# Altium PCB Project_traffic.PcbDoc
Units mil, origin at the board's own origin, x right, y up, seen from the top; angles counter-clockwise.
Board outline 3220 x 3730 mil, 2 copper layers (Top Layer, Bottom Layer); 48 components, 14 nets, 216 pads, 0 vias.
Unrouted connection lines stored in the file: 1.
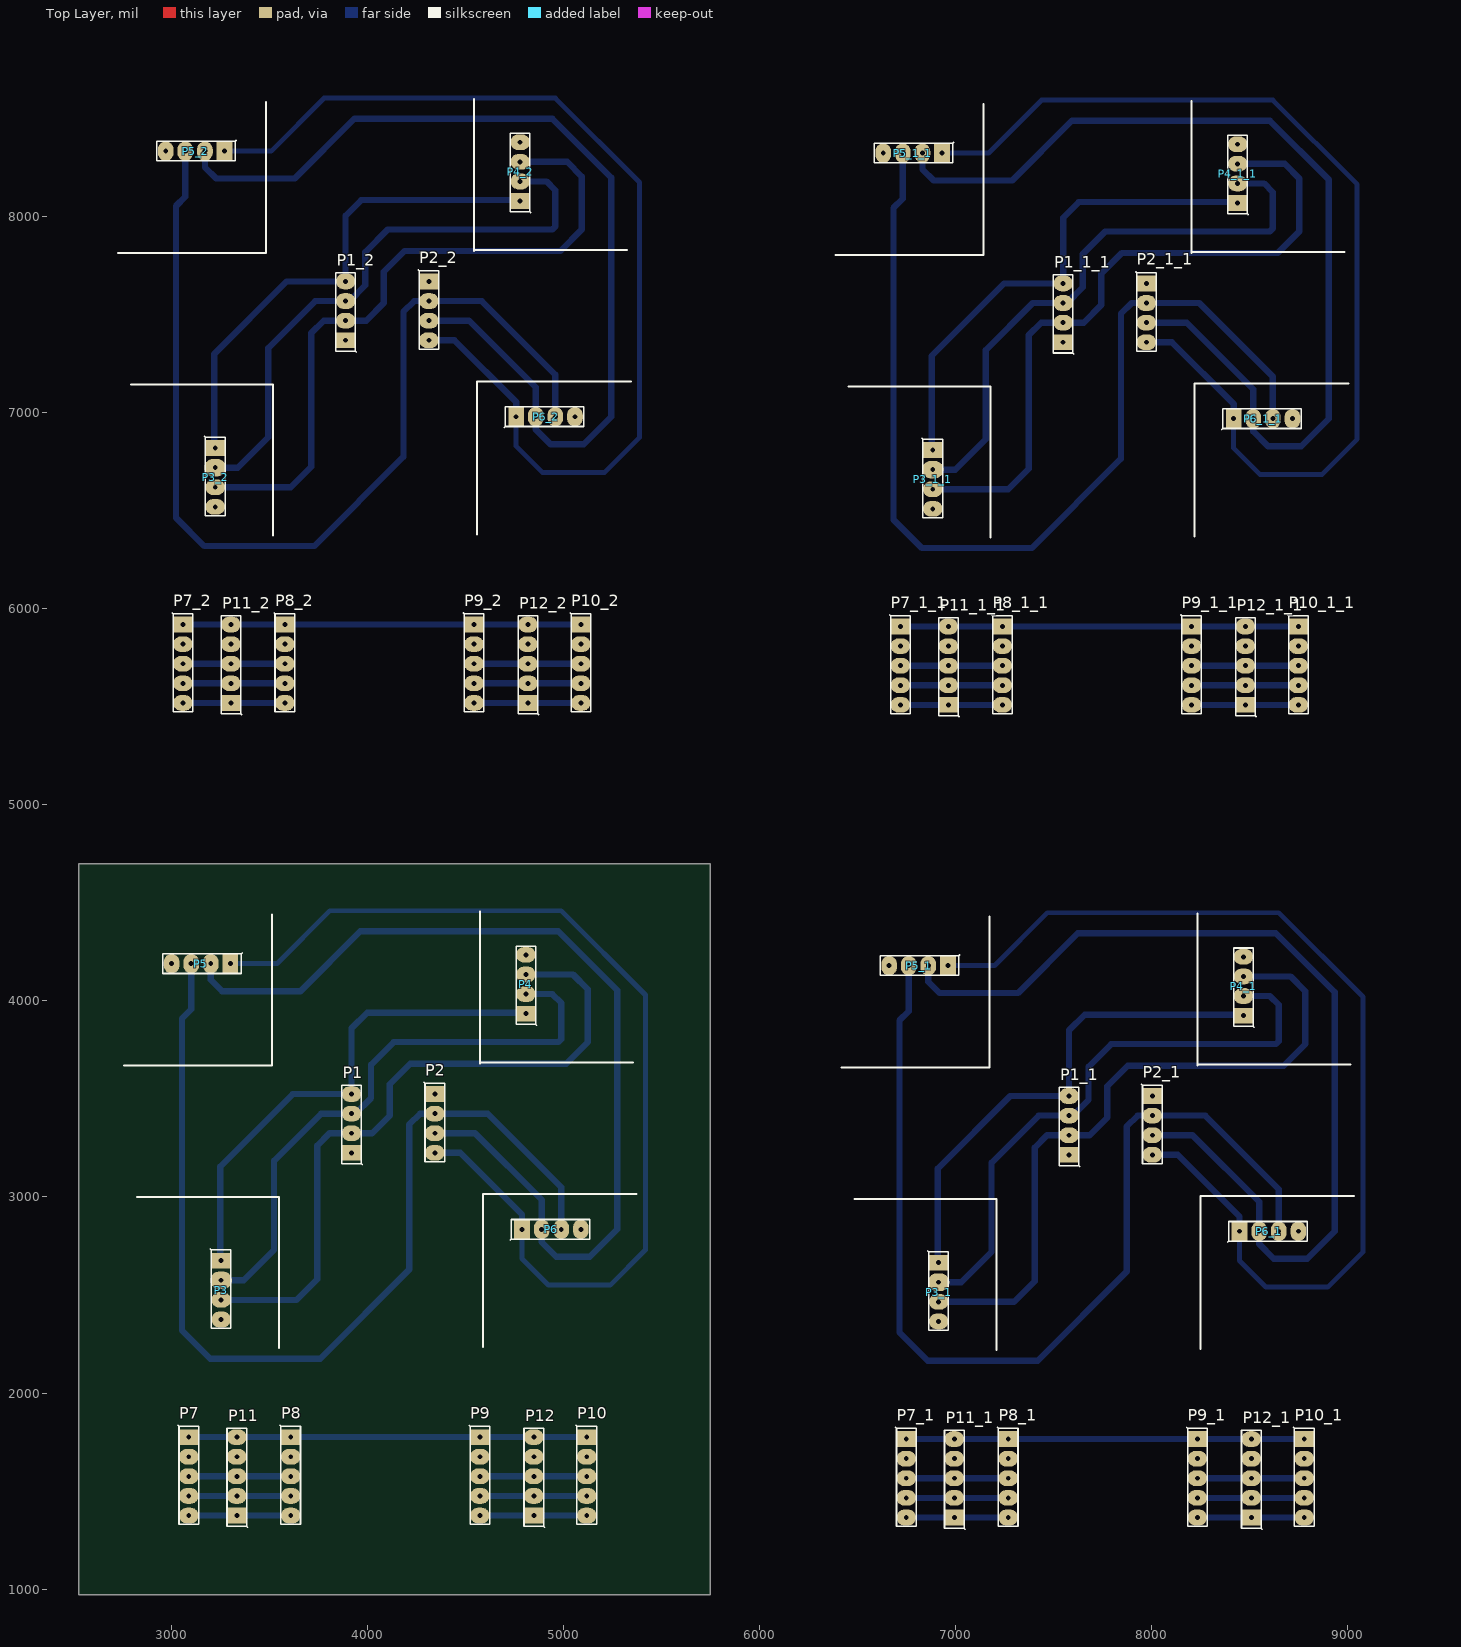
[diagram p0: Top Layer view]
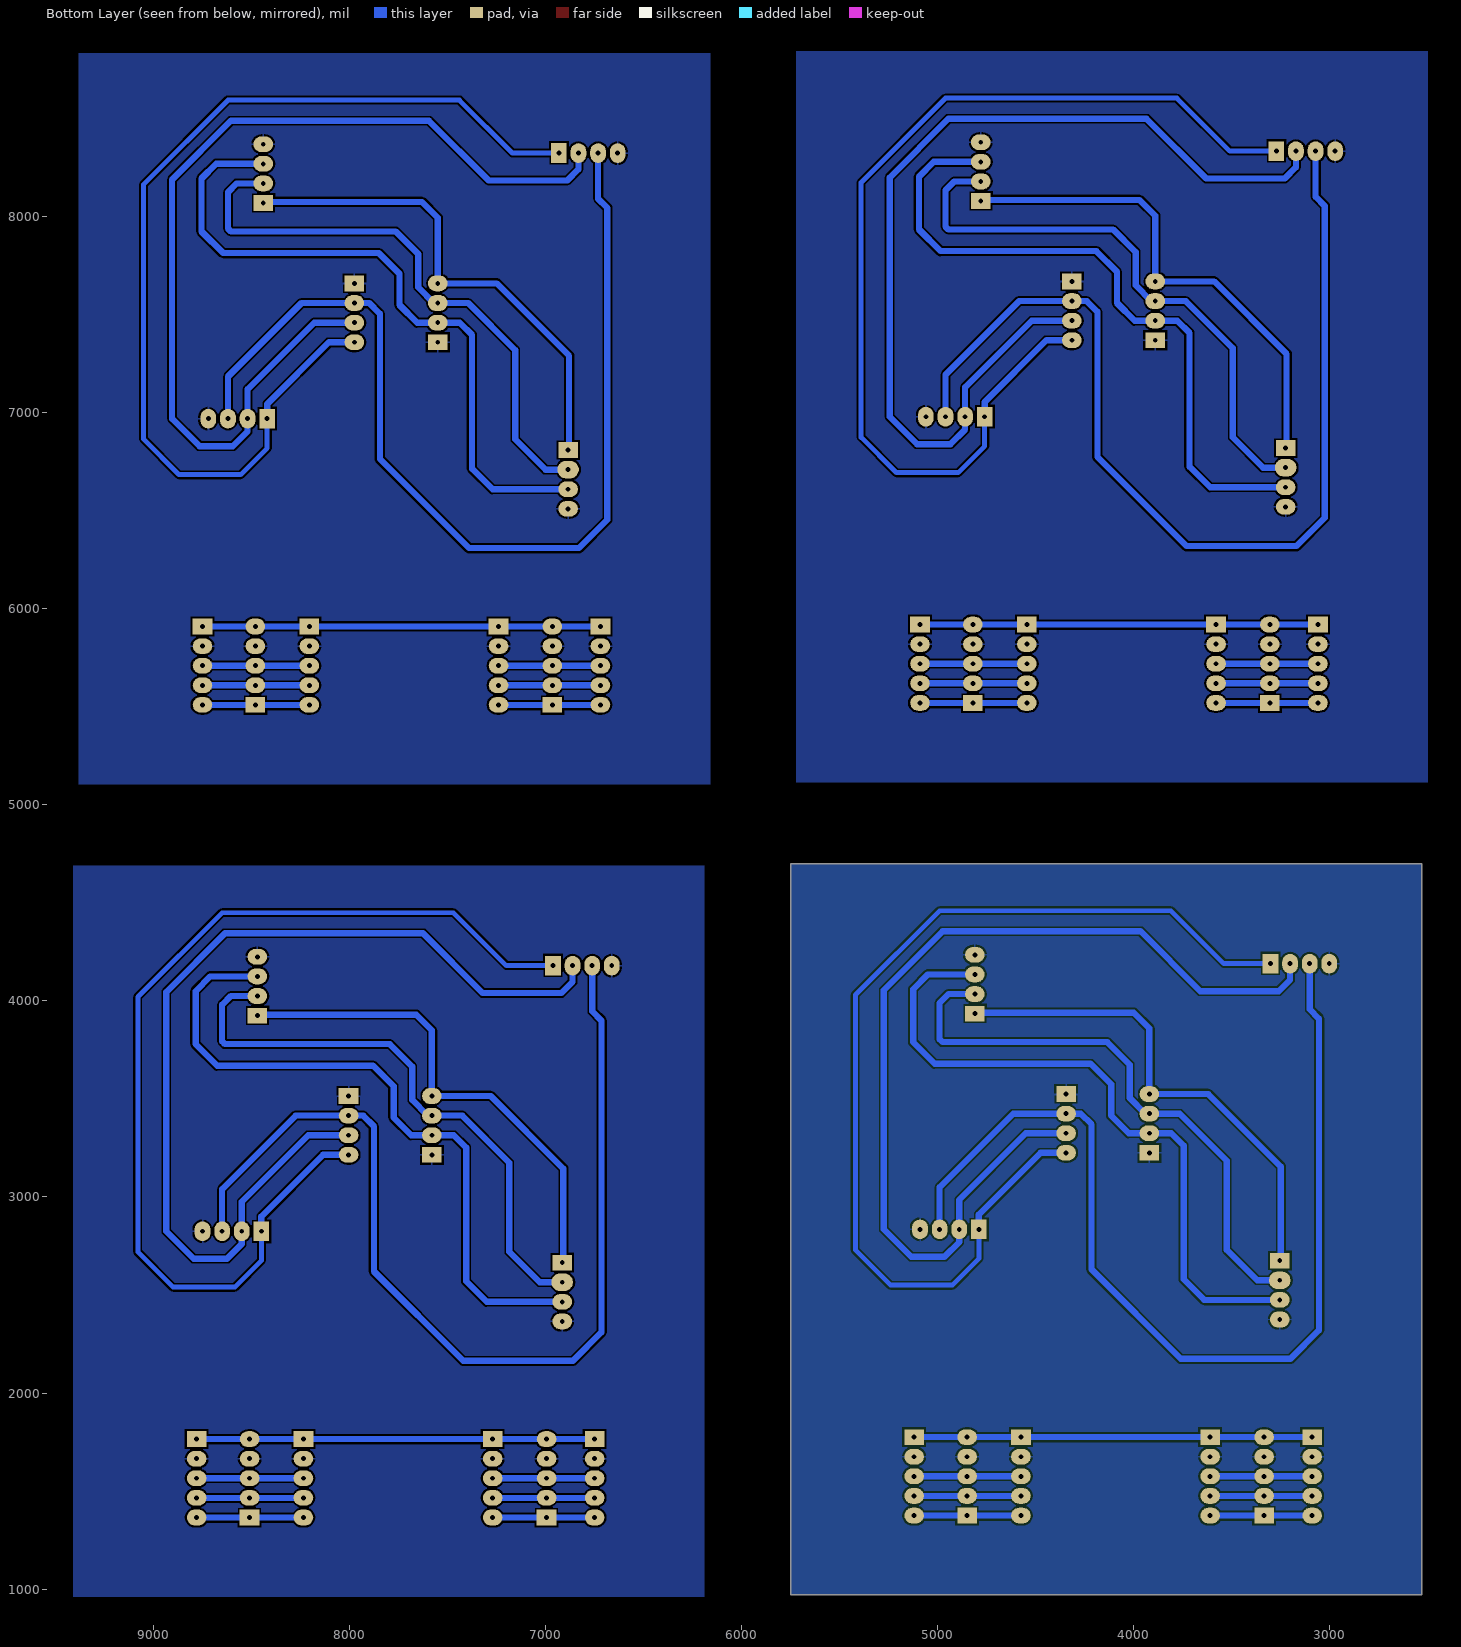
[diagram p1: Bottom Layer view, seen from below]

## Layer stack, top to bottom
Top Solder: solder mask 0.4, Solder Resist, Dk 3.5
Top Layer: signal copper 1.4
Dielectric 1: dielectric 12.6, FR-4, Dk 4.8
Bottom Layer: signal copper 1.4
Bottom Solder: solder mask 0.4, Solder Resist, Dk 3.5

## Board outline
2530,970 5750,970 5750,4700 2530,4700

## Design rules (kind name [scope] priority, off if disabled: settings)
Clearance [All] p1: gap=10 ignorepadtopadclearanceinfootprint=FALSE except(0: Arc-Hole Track-Hole SMDPad-Hole THPad-Hole Via-Hole Fill-Hole Poly-Hole Region-Hole Text-Hole)
PolygonConnect [All] p1: connectstyle=Relief reliefconductorwidth=10 reliefentries=4 polygonreliefangle="90 Angle" airgapwidth=10
RoutingVias [All] p1: holewidth=28 width=50 viastyle="Through Hole" minholewidth=28 minwidth=50 maxholewidth=28 maxwidth=50
SolderMaskExpansion [All] p1: expansion=4
Width [All] p1: maxlimit=50 minlimit=10 preferedwidth=25 toplayer_maxwidth=10 toplayer_prefwidth=10 minimp=50.000000 maximp=50.000000 favimp=50.000000
30 further rules are at their usual default settings.

## Classes and differential pairs
component class Project_traffic: P3 P4 P5 P6 P7 P8 P9 P10 P12

## Components (designator, comment, footprint, x,y, rotation, side; value= is the part's Value field where it differs from the comment)
P1 "Header 4" "Header 4"#1 3920,3225 r90 top
P1_1 "Header 4" "Header 4"#1 7580,3215 r90 top (schematic designator P1)
P1_1_1 "Header 4" "Header 4"#1 7550,7360 r90 top (schematic designator P1)
P1_2 "Header 4" "Header 4"#1 3890,7370 r90 top (schematic designator P1)
P2 "Header 4" "Header 4"#1 4345,3525 r270 top
P2_1 "Header 4" "Header 4"#1 8005,3515 r270 top (schematic designator P2)
P2_1_1 "Header 4" "Header 4"#1 7975,7660 r270 top (schematic designator P2)
P2_2 "Header 4" "Header 4"#1 4315,7670 r270 top (schematic designator P2)
P3 "Header 4" "Header 4"#2 3255,2675 r270 top
P3_1 "Header 4" "Header 4"#2 6915,2665 r270 top (schematic designator P3)
P3_1_1 "Header 4" "Header 4"#2 6885,6810 r270 top (schematic designator P3)
P3_2 "Header 4" "Header 4"#2 3225,6820 r270 top (schematic designator P3)
P4 "Header 4" "Header 4"#1 4810,3935 r90 top
P4_1 "Header 4" "Header 4"#1 8470,3925 r90 top (schematic designator P4)
P4_1_1 "Header 4" "Header 4"#1 8440,8070 r90 top (schematic designator P4)
P4_2 "Header 4" "Header 4"#1 4780,8080 r90 top (schematic designator P4)
P5 "Header 4" "Header 4"#1 3302.34,4190 r180 top
P5_1 "Header 4" "Header 4"#1 6962.34,4180 r180 top (schematic designator P5)
P5_1_1 "Header 4" "Header 4"#1 6932.34,8325 r180 top (schematic designator P5)
P5_2 "Header 4" "Header 4"#1 3272.34,8335 r180 top (schematic designator P5)
P6 "Header 4" "Header 4"#1 4790,2835 r0 top
P6_1 "Header 4" "Header 4"#1 8450,2825 r0 top (schematic designator P6)
P6_1_1 "Header 4" "Header 4"#1 8420,6970 r0 top (schematic designator P6)
P6_2 "Header 4" "Header 4"#1 4760,6980 r0 top (schematic designator P6)
P7 "Header 5" "Header 5" 3090,1775 r270 top
P7_1 "Header 5" "Header 5" 6750,1765 r270 top (schematic designator P7)
P7_1_1 "Header 5" "Header 5" 6720,5910 r270 top (schematic designator P7)
P7_2 "Header 5" "Header 5" 3060,5920 r270 top (schematic designator P7)
P8 "Header 5" "Header 5" 3610,1775 r270 top
P8_1 "Header 5" "Header 5" 7270,1765 r270 top (schematic designator P8)
P8_1_1 "Header 5" "Header 5" 7240,5910 r270 top (schematic designator P8)
P8_2 "Header 5" "Header 5" 3580,5920 r270 top (schematic designator P8)
P9 "Header 5" "Header 5" 4575,1775 r270 top
P9_1 "Header 5" "Header 5" 8235,1765 r270 top (schematic designator P9)
P9_1_1 "Header 5" "Header 5" 8205,5910 r270 top (schematic designator P9)
P9_2 "Header 5" "Header 5" 4545,5920 r270 top (schematic designator P9)
P10 "Header 5" "Header 5" 5120,1775 r270 top
P10_1 "Header 5" "Header 5" 8780,1765 r270 top (schematic designator P10)
P10_1_1 "Header 5" "Header 5" 8750,5910 r270 top (schematic designator P10)
P10_2 "Header 5" "Header 5" 5090,5920 r270 top (schematic designator P10)
P11 "Header 5" "Header 5" 3335,1375 r90 top
P11_1 "Header 5" "Header 5" 6995,1365 r90 top (schematic designator P11)
P11_1_1 "Header 5" "Header 5" 6965,5510 r90 top (schematic designator P11)
P11_2 "Header 5" "Header 5" 3305,5520 r90 top (schematic designator P11)
P12 "Header 5" "Header 5" 4850,1375 r90 top
P12_1 "Header 5" "Header 5" 8510,1365 r90 top (schematic designator P12)
P12_1_1 "Header 5" "Header 5" 8480,5510 r90 top (schematic designator P12)
P12_2 "Header 5" "Header 5" 4820,5520 r90 top (schematic designator P12)

## Footprints (in the part's own frame and the unit in brackets; to place one, negate y for a bottom-side part, rotate by r counter-clockwise, add the part's x,y. Pads: shape width x height; smd on the part's side, far side on the other; paste and mask are expansions set on the pad)
"Header 4"#1 [mil]
  rect 80x100 hole 25: 1(0,0)
  oval 80x100 hole 25: 2(100,0) 3(200,0) 4(300,0)
  silkscreen extent -60,-55 345,50, body extent -50,-50 350,50, height 350
"Header 4"#2 [mil]
  rect 80x100 hole 25: 1(0,0)
  oval 90x110 hole 25: 2(100,0)
  oval 80x100 hole 25: 3(200,0) 4(300,0)
  silkscreen extent -60,-55 345,50, body extent -50,-50 350,50, height 350
"Header 5" [mil]
  rect 80x100 hole 25: 1(0,0)
  oval 80x100 hole 25: 2(100,0) 3(200,0) 4(300,0) 5(400,0)
  silkscreen extent -60,-55 445,50, body extent -50,-50 450,50, height 350

## Part data
P1 P1_1 P1_1_1 P1_2 P2 P2_1 P2_1_1 P2_2 P3 P3_1 P3_1_1 P3_2 P4 P4_1 P4_1_1 P4_2 P5 P5_1 P5_1_1 P5_2 P6 P6_1 P6_1_1 P6_2: "Header, 4-Pin"
P7 P7_1 P7_1_1 P7_2 P8 P8_1 P8_1_1 P8_2 P9 P9_1 P9_1_1 P9_2 P10 P10_1 P10_1_1 P10_2 P11 P11_1 P11_1_1 P11_2 P12 P12_1 P12_1_1 P12_2: "Header, 5-Pin", LatestRevisionDate=17-Jul-2002, LatestRevisionNote="Re-released for DXP Platform.", Publisher="Altium Limited"

## Nets (pads, with @x,y where several pads share a name; then routed paths per layer and width w, separated by ;. In a path a pad name is that pad's centre, name@x,y a point inside that pad or via, vN(x,y) a via of type N, cw(c..) or ccw(c..) an arc to the next point about the centre after c; other vN are vias at no path point)
GND: P1.1 P2.1 P3.4 P4.4 P5.4 P6.4 P7.2 P8.2 P9.2 P10.2 P11.4 P12.4
LOAD1: P7.5 P8.5 P11.1 | length 520
  Bottom Layer w32: P7.5 P11.1 P8.5
LOAD2: P9.5 P10.5 P12.1 | length 545
  Bottom Layer w32: P9.5 P12.1 P10.5
P1_G: P1.4 P3.1 P4.1 | length 2565.5
  Bottom Layer w32: P3.1 3250,2680 3250,3155 3620,3525 P1.4 3920,3860 4000,3940 4805,3940 P4.1
P1_R: P1.2 P3.3 P4.3 | length 3524
  Bottom Layer w32: P3.3 3640,2475 3745,2580 3745,3262 3808,3325 P1.2 4025,3325 4115,3415 4115,3575 4220,3680 5015,3680 5125,3790 5125,4060 5050,4135 P4.3
P1_Y: P1.3 P3.2 P4.2 | length 2994.2
  Bottom Layer w32: P3.2 3370,2575 3525,2730 3525,3185 3765,3425 P1.3 3940,3425 4020,3505 4020,3675 4135,3790 4975,3790 4990,3805 4990,3990 4945,4035 P4.2
P2_G: P2.4 P5.1 P6.1 | length 5268.6
  Bottom Layer w25: P5.1 3540,4190 3810,4460 4990,4460 5420,4030 5420,2730 5240,2550 4925,2550 4790,2685 P6.1
  Bottom Layer w32: P2.4 4475,3225 4790,2910 P6.1
P2_R: P2.2 P5.3 P6.3 | length 5206.2
  Bottom Layer w32: P5.3 3102.34,3957.34 3055,3910 3055,2320 3200,2175 3760,2175 4215,2630 4215,3370 4270,3425 P2.2 4615,3425 4990,3050 P6.3
P2_Y: P2.3 P5.2 P6.2 | length 5024.4
  Bottom Layer w32: P5.2 3202.34,4107.66 3260,4050 3660,4050 3965,4355 4975,4355 5275,4055 5275,2835 5135,2695 4965,2695 4890,2770 P6.2 4890,2985 4550,3325 P2.3
SCLK1: P7.4 P8.4 P11.2 | length 520
  Bottom Layer w32: P7.4 P11.2 P8.4
SCLK2: P9.4 P10.4 P12.2 | length 545
  Bottom Layer w32: P9.4 P12.2 P10.4
SDI1: P7.3 P8.3 P11.3 | length 520
  Bottom Layer w32: P7.3 P11.3 P8.3
SDI2: P9.3 P10.3 P12.3 | length 545
  Bottom Layer w32: P9.3 P12.3 P10.3
VCC: P7.1 P8.1 P9.1 P10.1 P11.5 P12.5 | length 2030
  Bottom Layer w30: P7.1 P11.5 P8.1 P9.1 P12.5 P10.1
pads on no net: P1_1.1 P1_1.2 P1_1.3 P1_1.4 P1_1_1.1 P1_1_1.2 P1_1_1.3 P1_1_1.4 P1_2.1 P1_2.2 P1_2.3 P1_2.4 P2_1.1 P2_1.2 P2_1.3 P2_1.4 P2_1_1.1 P2_1_1.2 P2_1_1.3 P2_1_1.4 P2_2.1 P2_2.2 P2_2.3 P2_2.4 P3_1.1 P3_1.2 P3_1.3 P3_1.4 P3_1_1.1 P3_1_1.2 P3_1_1.3 P3_1_1.4 P3_2.1 P3_2.2 P3_2.3 P3_2.4 P4_1.1 P4_1.2 P4_1.3 P4_1.4 P4_1_1.1 P4_1_1.2 P4_1_1.3 P4_1_1.4 P4_2.1 P4_2.2 P4_2.3 P4_2.4 P5_1.1 P5_1.2 P5_1.3 P5_1.4 P5_1_1.1 P5_1_1.2 P5_1_1.3 P5_1_1.4 P5_2.1 P5_2.2 P5_2.3 P5_2.4 P6_1.1 P6_1.2 P6_1.3 P6_1.4 P6_1_1.1 P6_1_1.2 P6_1_1.3 P6_1_1.4 P6_2.1 P6_2.2 P6_2.3 P6_2.4 P7_1.1 P7_1.2 P7_1.3 P7_1.4 P7_1.5 P7_1_1.1 P7_1_1.2 P7_1_1.3 P7_1_1.4 P7_1_1.5 P7_2.1 P7_2.2 P7_2.3 P7_2.4 P7_2.5 P8_1.1 P8_1.2 P8_1.3 P8_1.4 P8_1.5 P8_1_1.1 P8_1_1.2 P8_1_1.3 P8_1_1.4 P8_1_1.5 P8_2.1 P8_2.2 P8_2.3 P8_2.4 P8_2.5 P9_1.1 P9_1.2 P9_1.3 P9_1.4 P9_1.5 P9_1_1.1 P9_1_1.2 P9_1_1.3 P9_1_1.4 P9_1_1.5 P9_2.1 P9_2.2 P9_2.3 P9_2.4 P9_2.5 P10_1.1 P10_1.2 P10_1.3 P10_1.4 P10_1.5 P10_1_1.1 P10_1_1.2 P10_1_1.3 P10_1_1.4 P10_1_1.5 P10_2.1 P10_2.2 P10_2.3 P10_2.4 P10_2.5 P11_1.1 P11_1.2 P11_1.3 P11_1.4 P11_1.5 P11_1_1.1 P11_1_1.2 P11_1_1.3 P11_1_1.4 P11_1_1.5 P11_2.1 P11_2.2 P11_2.3 P11_2.4 P11_2.5 P12_1.1 P12_1.2 P12_1.3 P12_1.4 P12_1.5 P12_1_1.1 P12_1_1.2 P12_1_1.3 P12_1_1.4 P12_1_1.5 P12_2.1 P12_2.2 P12_2.3 P12_2.4 P12_2.5
copper on no net: | length 89423.9
  Bottom Layer w25: 3272.34,8335 3510,8335 3780,8605 4960,8605 5390,8175 5390,6875 5210,6695 4895,6695 4760,6830 4760,6980 ; 6932.34,8325 7170,8325 7440,8595 8620,8595 9050,8165 9050,6865 8870,6685 8555,6685 8420,6820 8420,6970 ; 6962.34,4180 7200,4180 7470,4450 8650,4450 9080,4020 9080,2720 8900,2540 8585,2540 8450,2675 8450,2825
  Bottom Layer w30: 3060,5920 3305,5920 3580,5920 4545,5920 4820,5920 5090,5920 ; 6720,5910 6965,5910 7240,5910 8205,5910 8480,5910 8750,5910 ; 6750,1765 6995,1765 7270,1765 8235,1765 8510,1765 8780,1765
  Bottom Layer w32: 3060,5520 3305,5520 3580,5520 ; 3060,5620 3305,5620 3580,5620 ; 3060,5720 3305,5720 3580,5720 ; 3072.34,8335 3072.34,8102.34 3025,8055 3025,6465 3170,6320 3730,6320 4185,6775 4185,7515 4240,7570 4315,7570 4585,7570 4960,7195 4960,6980 ; 3172.34,8335 3172.34,8252.66 3230,8195 3630,8195 3935,8500 4945,8500 5245,8200 5245,6980 5105,6840 4935,6840 4860,6915 4860,6980 4860,7130 4520,7470 4315,7470 ; 3225,6620 3610,6620 3715,6725 3715,7407 3778,7470 3890,7470 3995,7470 4085,7560 4085,7720 4190,7825 4985,7825 5095,7935 5095,8205 5020,8280 4780,8280 ; 3225,6720 3340,6720 3495,6875 3495,7330 3735,7570 3890,7570 3910,7570 3990,7650 3990,7820 4105,7935 4945,7935 4960,7950 4960,8135 4915,8180 4780,8180 ; 3225,6820 3220,6825 3220,7300 3590,7670 3890,7670 3890,8005 3970,8085 4775,8085 4780,8080 ; 4315,7370 4445,7370 4760,7055 4760,6980 ; 4545,5520 4820,5520 5090,5520 ; 4545,5620 4820,5620 5090,5620 ; 4545,5720 4820,5720 5090,5720 ; 6720,5510 6965,5510 7240,5510 ; 6720,5610 6965,5610 7240,5610 ; 6720,5710 6965,5710 7240,5710 ; 6732.34,8325 6732.34,8092.34 6685,8045 6685,6455 6830,6310 7390,6310 7845,6765 7845,7505 7900,7560 7975,7560 8245,7560 8620,7185 8620,6970 ; 6750,1365 6995,1365 7270,1365 ; 6750,1465 6995,1465 7270,1465 ; 6750,1565 6995,1565 7270,1565 ; 6762.34,4180 6762.34,3947.34 6715,3900 6715,2310 6860,2165 7420,2165 7875,2620 7875,3360 7930,3415 8005,3415 8275,3415 8650,3040 8650,2825 ; 6832.34,8325 6832.34,8242.66 6890,8185 7290,8185 7595,8490 8605,8490 8905,8190 8905,6970 8765,6830 8595,6830 8520,6905 8520,6970 8520,7120 8180,7460 7975,7460 ; 6862.34,4180 6862.34,4097.66 6920,4040 7320,4040 7625,4345 8635,4345 8935,4045 8935,2825 8795,2685 8625,2685 8550,2760 8550,2825 8550,2975 8210,3315 8005,3315 ; 6885,6610 7270,6610 7375,6715 7375,7397 7438,7460 7550,7460 7655,7460 7745,7550 7745,7710 7850,7815 8645,7815 8755,7925 8755,8195 8680,8270 8440,8270 ; 6885,6710 7000,6710 7155,6865 7155,7320 7395,7560 7550,7560 7570,7560 7650,7640 7650,7810 7765,7925 8605,7925 8620,7940 8620,8125 8575,8170 8440,8170 ; 6885,6810 6880,6815 6880,7290 7250,7660 7550,7660 7550,7995 7630,8075 8435,8075 8440,8070 ; 6915,2465 7300,2465 7405,2570 7405,3252 7468,3315 7580,3315 7685,3315 7775,3405 7775,3565 7880,3670 8675,3670 8785,3780 8785,4050 8710,4125 8470,4125 ; 6915,2565 7030,2565 7185,2720 7185,3175 7425,3415 7580,3415 7600,3415 7680,3495 7680,3665 7795,3780 8635,3780 8650,3795 8650,3980 8605,4025 8470,4025 ; 6915,2665 6910,2670 6910,3145 7280,3515 7580,3515 7580,3850 7660,3930 8465,3930 8470,3925 ; 7975,7360 8105,7360 8420,7045 8420,6970 ; 8005,3215 8135,3215 8450,2900 8450,2825 ; 8205,5510 8480,5510 8750,5510 ; 8205,5610 8480,5610 8750,5610 ; 8205,5710 8480,5710 8750,5710 ; 8235,1365 8510,1365 8780,1365 ; 8235,1465 8510,1465 8780,1465 ; 8235,1565 8510,1565 8780,1565

## Polygon pours and split planes (outlines as drawn)
no net on Bottom Layer (solid, pour order 66): 2500,8845 5720,8845 5720,5115 2500,5115
no net on Bottom Layer (solid, pour order 64): 6160,8835 9380,8835 9380,5105 6160,5105
no net on Bottom Layer (solid, pour order 62): 6190,4690 9410,4690 9410,960 6190,960
GND on Bottom Layer (solid, pour order 60): 2530,4700 5750,4700 5750,970 2530,970

## Silkscreen, mask and mechanical layers (free items; w line width, h text height)
Top Overlay:
  lines w10: 2730,7815 3485,7815 3485,8585 ; 2760,3670 3515,3670 3515,4440 ; 2795,7145 3520,7145 3520,6375 ; 2825,3000 3550,3000 3550,2230 ; 4545,7825 4545,8600 ; 4545,7830 4770,7830 5325,7830 ; 4560,6380 4560,7160 5345,7160 ; 4575,3680 4575,4455 ; 4575,3685 4800,3685 5355,3685 ; 4590,2235 4590,3015 5375,3015 ; 6390,7805 7145,7805 7145,8575 ; 6420,3660 7175,3660 7175,4430 ; 6455,7135 7180,7135 7180,6365 ; 6485,2990 7210,2990 7210,2220 ; 8205,7815 8205,8590 ; 8205,7820 8430,7820 8985,7820 ; 8220,6370 8220,7150 9005,7150 ; 8235,3670 8235,4445 ; 8235,3675 8460,3675 9015,3675 ; 8250,2225 8250,3005 9035,3005